# Altium PCB Arduino_Design_Project.PcbDoc
Units mm, origin at the board's own origin, x right, y up, seen from the top; angles counter-clockwise.
Board outline 85 x 56 mm, 2 copper layers (Top Layer, Bottom Layer); 52 components, 53 nets, 203 pads, 0 vias.
Unrouted connection lines stored in the file: 142.
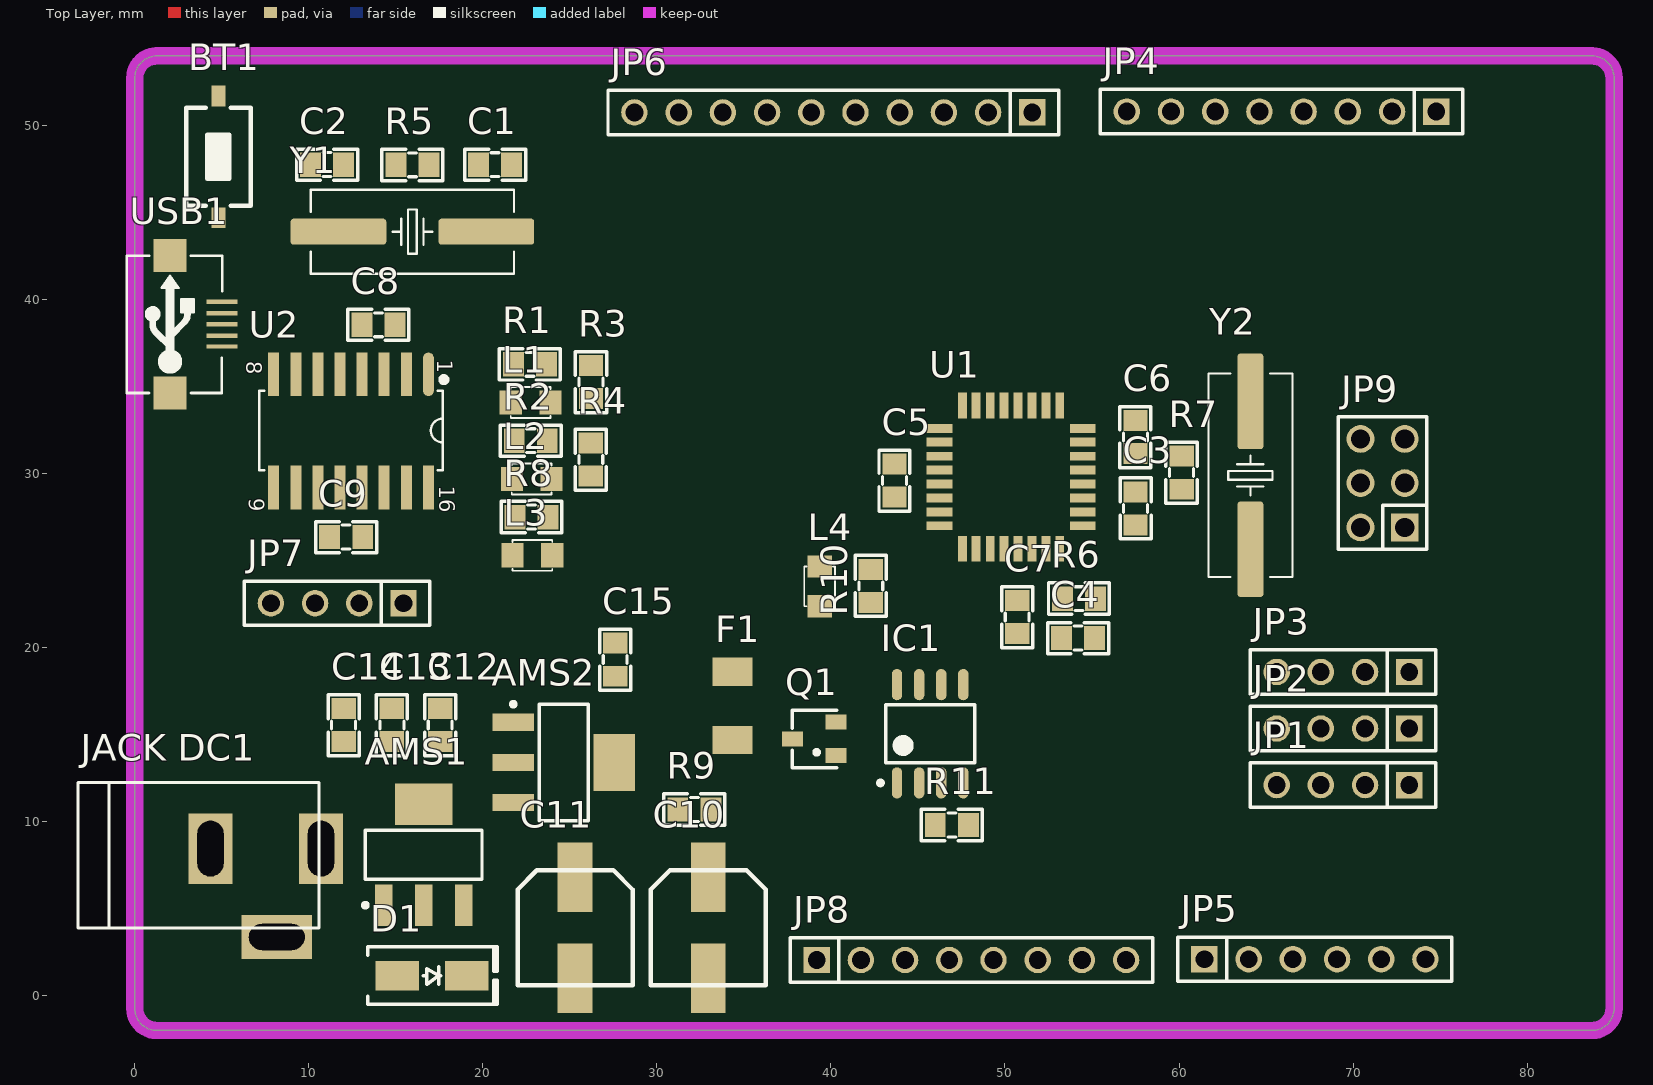
[diagram p0: Top Layer view]
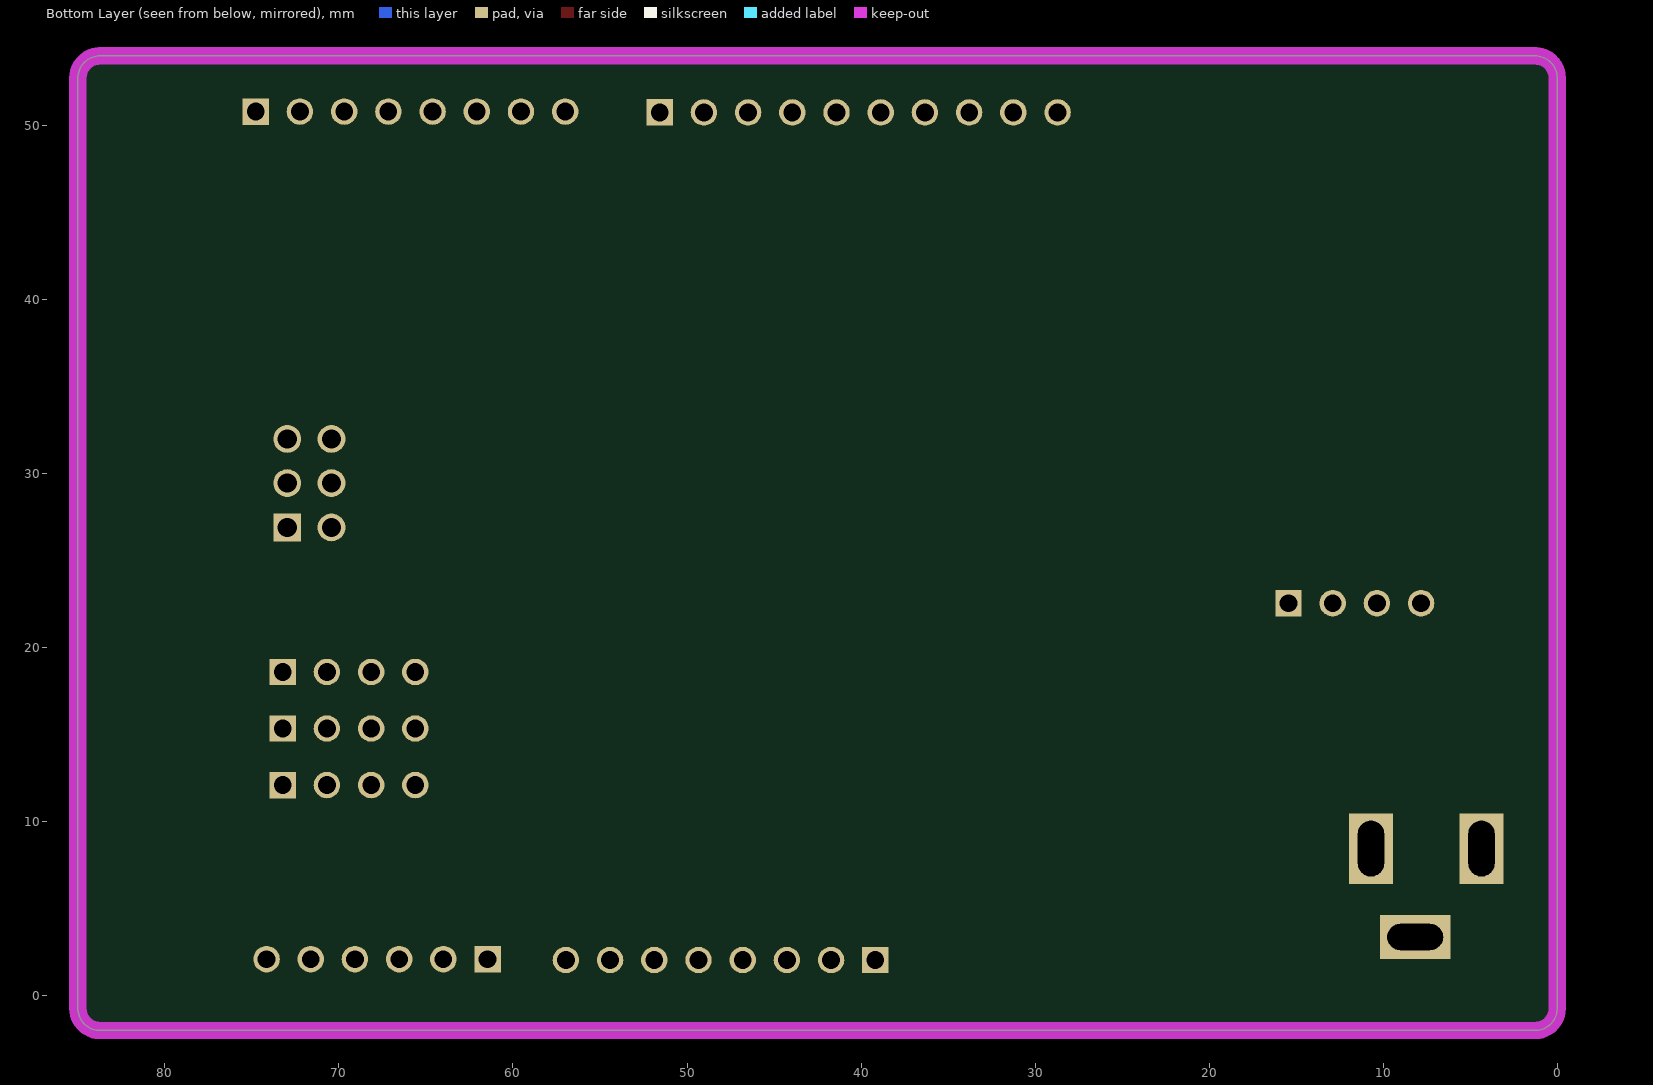
[diagram p1: Bottom Layer view, seen from below]

## Layer stack, top to bottom
Top Solder: solder mask 0.0102, Solder Resist, Dk 3.5
Top Layer: signal copper 0.0356
Dielectric 1: dielectric 0.32, FR-4, Dk 4.8
Bottom Layer: signal copper 0.0356
Bottom Solder: solder mask 0.0102, Solder Resist, Dk 3.5

## Board outline
0,-0.73 0,52.73 cw(c1.27,52.73) 1.27,54 83.73,54 cw(c83.73,52.73) 85,52.73 85,-0.73 cw(c83.73,-0.73) 83.73,-2 1.27,-2 cw(c1.27,-0.73)

## Design rules (kind name [scope] priority, off if disabled: settings)
Clearance [All] p1: gap=0.254 ignorepadtopadclearanceinfootprint=FALSE
DiffPairsRouting [All] p1: maxlimit=0.254 minlimit=0.254 mostfreqgap=0.254 toplayer_minwidth=0.381 toplayer_maxwidth=0.381 toplayer_prefwidth=0.381 bottomlayer_minwidth=0.381 bottomlayer_maxwidth=0.381 bottomlayer_prefwidth=0.381 maxuncoupledlength=12.7
PolygonConnect [All] p1: connectstyle=Relief reliefconductorwidth=0.254 reliefentries=4 polygonreliefangle="90 Angle" airgapwidth=0.254
RoutingVias [All] p1: holewidth=0.711 width=1.27 viastyle="Through Hole" minholewidth=0.711 minwidth=1.27 maxholewidth=0.711 maxwidth=1.27
SolderMaskExpansion [All] p1: expansion=0.102 istentingtop=FALSE
SupplyNets "Schematic Supply Nets_4" [InNet('GND')] p1: voltage=0.000
SupplyNets "Schematic Supply Nets_3" [InNet('VIN')] p2: voltage=0.000
SupplyNets "Schematic Supply Nets_2" [InNet('3.3V')] p3: voltage=0.000
SupplyNets "Schematic Supply Nets_1" [InNet('5V')] p4: voltage=0.000
SupplyNets "Schematic Supply Nets" [InNet('VUSB')] p5: voltage=0.000
Width [All] p1: maxlimit=1.016 minlimit=0.254 preferedwidth=0.508
29 further rules are at their usual default settings.

## Classes and differential pairs
differential pair USB: +USB_P -USB_N

## Components (designator, comment, footprint, x,y, rotation, side; value= is the part's Value field where it differs from the comment)
AMS1 "AMS1117-3.3V" SOT223 16.6,8.1 r0 top value="AMS1117-3.3V SOT223"
AMS2 "AMS1117-3.3V" SOT223 24.65,13.4 r270 top value="AMS1117-3.3V SOT223"
BT1 "Nut Nhan 2 Chan SMD 3x6x2.5" "Nut Nhan 2 Chan SMD 3x6x2.5" 4.8,48.2 r270 top
C1 "22pF" "tu 0805" 20.7,47.75 r0 top
C2 "22pF" "tu 0805" 11.054,47.75 r180 top
C3 "22pF" "tu 0805" 57.503,28.004 r270 top
C4 "104" "tu 0805" 54.2,20.55 r180 top
C5 "104" "tu 0805" 43.65,29.6 r90 top
C6 "22pF" "tu 0805" 57.497,32.096 r90 top
C7 "104" "tu 0805" 50.703,21.754 r270 top
C8 "104" "tu 0805" 13.996,38.553 r0 top
C9 "104" "tu 0805" 12.15,26.35 r180 top
C10 "47uF" "tu nhom 6.3 (d)" 32.95,3.9 r270 top
C11 "47uF" "tu nhom 6.3 (d)" 25.3,3.9 r270 top
C12 "104" "tu 0805" 17.55,15.55 r270 top
C13 "104" "tu 0805" 14.775,15.55 r270 top
C14 "104" "tu 0805" 12,15.55 r270 top
C15 "104" "tu 0805" 27.6,19.3 r90 top
D1 "M7" "DIODE SMA" 17.069,1.15 r0 top
F1 "0.5A 125V" "Cau Chi SMD1808" 34.35,16.65 r270 top
IC1 "LM358 SOP8" "SOP 8" 45.7,15.05 r90 top
"JACK DC1" "JACK DC 5.5" "JACK DC 5.5" 7.525,5.91 r0 top value="Jac DC"
JP1 "JP 1x4 2.54" "JP 1x4 CT" 73.23,12.104 r180 top
JP2 "JP 1x4 2.54" "JP 1x4 CT" 73.23,15.352 r180 top
JP3 "JP 1x4 2.54" "JP 1x4 CT" 73.23,18.6 r180 top
JP4 "JP 1x8 2.54" "JP 1x8 CT" 74.78,50.8 r180 top
JP5 "JP 1x6 2.54" "JP 1x6 CT" 61.46,2.1 r0 top
JP6 "JP 1x10 2.54" "JP 1x10 CT" 51.57,50.75 r180 top
JP7 "JP 1x4 2.54" "JP 1x4 CT" 15.44,22.55 r180 top
JP8 "JP 1x8 2.54" "JP 1x8 CT" 39.18,2.05 r0 top
JP9 "JP 2x3 2.54" "JP 2x3 DT" 71.7,29.45 r90 top
L1 "LED 0805" LED-0805-Yellow 21.6,34.083 r0 top
L2 "LED 0805" LED-0805-Yellow 21.664,29.692 r0 top
L3 "LED 0805" LED-0805-Red 21.7,25.3 r0 top
L4 "LED 0805" LED-0805-Red 39.35,24.663 r270 top
Q1 "HF" SOT-23 39.05,14.745 r90 top value=C9014
R1 "1k" "tro smd 0805" 22.704,36.215 r180 top
R2 "1k" "tro smd 0805" 22.746,31.951 r0 top
R3 "1k" "tro smd 0805" 26.15,35.25 r90 top
R4 "1k" "tro smd 0805" 26.261,30.804 r270 top
R5 "1M" "tro smd 0805" 15.95,47.801 r0 top
R6 "10k" "tro smd 0805" 54.25,22.75 r180 top
R7 "1M" "tro smd 0805" 60.211,30.054 r270 top
R8 "1k" "tro smd 0805" 22.796,27.559 r0 top
R9 "10k" "tro smd 0805" 32.154,10.639 r180 top
R10 "1k" "tro smd 0805" 42.35,23.55 r270 top
R11 "10k" "tro smd 0805" 46.95,9.75 r180 top
U1 "ATMEGA168-20AU" ATMEGA168 50.35,29.8 r180 top
U2 "CH340C" SOIC16_50_284_25X90_SMT 12.45,32.45 r270 top
USB1 "USB Micro 5p SMD" "USB Micro 5p SMD" 5,38.57 r90 top
Y1 "16Mhz" "Thach Anh 2 chan SMD" 15.95,43.9 r0 top value=4Mhz
Y2 "16Mhz" "Thach Anh 2 chan SMD" 64.1,29.9 r270 top value=4Mhz

## Footprints (in the part's own frame and the unit in brackets; to place one, negate y for a bottom-side part, rotate by r counter-clockwise, add the part's x,y. Pads: shape width x height; smd on the part's side, far side on the other; paste and mask are expansions set on the pad)
ATMEGA168 [mil]
  rect 58x20 smd: 1(-162,110) 2(-162,79) 3(-162,47) 4(-162,16) 5(-162,-16) 6(-162,-47) 7(-162,-79) 8(-162,-110) 17(162,-110) 18(162,-79) 19(162,-47) 20(162,-16) 21(162,16) 22(162,47) 23(162,79) 24(162,110)
  rect 20x58 smd: 9(-110,-162) 10(-79,-162) 11(-47,-162) 12(-16,-162) 13(16,-162) 14(47,-162) 15(79,-162) 16(110,-162) 25(110,162) 26(79,162) 27(47,162) 28(16,162) 29(-16,162) 30(-47,162) 31(-79,162) 32(-110,162)
  body extent -177,-177 177,177, height 47
"Cau Chi SMD1808" [mil]
  rect 64x90 smd: 1(-77,0) 2(77,0)
  body extent -91,-39 91,39, height 39
"DIODE SMA" [mm] "SMA"
  rect 2.5x1.7 smd: 1(-2,0) 2(2,0)
  silkscreen extent -3.68,-1.65 3.75,1.65, body extent -2.6,-1.37 2.6,1.37, height 2.4
"JACK DC 5.5" [mm] "Jac DC input"
  rect 2.54x4.064 hole 1.5 slot 3.2 at 90 deg: 1(3.175,2.54) 2(-3.175,2.54)
  rect 4.064x2.54 hole 1.5 slot 3.2 at 0 deg: 3(0.635,-2.54)
  silkscreen extent -10.79,-2.03 3.05,6.35, body extent -10.42,-2.67 3.4,6.84, height 11.02
"JP 1x4 CT" [mm]
  rect 1.52x1.52 hole 1.02: 1(0,0)
  round 1.52 hole 1.02: 2(2.54,0) 3(5.08,0) 4(7.62,0)
  silkscreen extent -1.52,-1.27 9.14,1.27, body extent -1.52,-1.25 9.14,1.25, height 8.51
"JP 1x6 CT" [mm] "6 row, straight, gold plating"
  rect 1.52x1.52 hole 1.02: 1(0,0)
  round 1.52 hole 1.02: 2(2.54,0) 3(5.08,0) 4(7.62,0) 5(10.16,0) 6(12.7,0)
  silkscreen extent -1.52,-1.27 14.22,1.27, body extent -1.52,-1.25 14.22,1.25, height 8.51
"JP 1x8 CT" [mm] "8 row, straight, gold plating"
  rect 1.52x1.52 hole 1.02: 1(0,0)
  round 1.52 hole 1.02: 2(2.54,0) 3(5.08,0) 4(7.62,0) 5(10.16,0) 6(12.7,0) 7(15.24,0) 8(17.78,0)
  silkscreen extent -1.52,-1.27 19.3,1.27, body extent -1.52,-1.25 19.3,1.25, height 8.51
"JP 1x10 CT" [mm] "10 row, straight, gold plating"
  rect 1.52x1.52 hole 1.02: 1(0,0)
  round 1.52 hole 1.02: 2(2.54,0) 3(5.08,0) 4(7.62,0) 5(10.16,0) 6(12.7,0) 7(15.24,0) 8(17.78,0) 9(20.32,0) 10(22.86,0)
  silkscreen extent -1.52,-1.27 24.38,1.27, body extent -1.52,-1.25 24.38,1.25, height 8.51
"JP 2x3 DT" [mm]
  rect 1.6x1.6 hole 1.1: 1(-2.54,-1.27)
  round 1.6 hole 1.1: 2(0,-1.27) 3(2.54,-1.27) 4(2.54,1.27) 5(0,1.27) 6(-2.54,1.27)
  silkscreen extent -3.81,-2.54 3.81,2.54, body extent -3.81,-2.54 3.81,2.54, height 8.55
LED-0805-Red [mil]
  rect 50x55 smd: 1(0,0) 2(90,0)
  silkscreen extent 0,-35 90,35, body extent 5,-25 85,25, height 43
LED-0805-Yellow [mil]
  rect 50x55 smd: 1(0,0) 2(90,0)
  silkscreen extent 0,-35 90,35, body extent 5,-25 85,25, height 43
"Nut Nhan 2 Chan SMD 3x6x2.5" [mm] "Switch SMD type"
  rect 1.2x0.8 smd: 1(-3.5,0) 2(3.5,0)
  silkscreen extent -2.82,-1.85 2.82,1.85, body extent -3.05,-1.85 3.05,1.85, height 2.5
SOIC16_50_284_25X90_SMT [mm]
  oval 2.5x0.635 smd mask+0.076: 1(-3.25,4.42)
  rect 2.5x0.635 smd mask+0.076: 2(-3.25,3.15) 3(-3.25,1.88) 4(-3.25,0.61) 5(-3.25,-0.66) 6(-3.25,-1.93) 7(-3.25,-3.2) 8(-3.25,-4.47) 9(3.25,-4.47) 10(3.25,-3.2) 11(3.25,-1.93) 12(3.25,-0.66) 13(3.25,0.61) 14(3.25,1.88) 15(3.25,3.15) 16(3.25,4.42)
  silkscreen extent -3.07,-5.3 2.26,5.44, body extent -3.02,-4.97 2.98,4.93, height 1.4
"SOP 8" [mm] "SOIC, 8-Leads, Body 4.9x3.9mm, Pitch 1.27mm, IPC High Density"
  oval 1.8x0.6 smd: 1(-2.825,1.905) 2(-2.825,0.635) 3(-2.825,-0.635) 4(-2.825,-1.905) 5(2.825,-1.905) 6(2.825,-0.635) 7(2.825,0.635) 8(2.825,1.905)
  silkscreen extent -2.95,-2.55 1.68,2.98, body extent -2.99,-2.45 3,2.45, height 1.6
SOT223 [mm]
  rect 1x2.4 smd: 1(-2.3,-2.9) 2(0,-2.9) 3(2.3,-2.9)
  rect 3.3x2.4 smd: 4(0,2.9)
  silkscreen extent -3.47,-3.02 3.35,1.4, body extent -3.25,-3.56 3.25,3.4, height 1.68
SOT-23 [mm] "SOT 23 _ 1-3-2"
  rect 0.85x1.2 smd: 1(-0.94,-1.245) 2(0.985,-1.25) 3(0.005,1.25)
  silkscreen extent -1.65,-1.27 1.65,1.27, body extent -1.47,-1.33 1.53,1.17, height 1.06
"Thach Anh 2 chan SMD" [mm] "SMD Crystal HC49/US-SM package"
  round 0.508 on Mech15: 0(0,0)
  rrect25% 5.5x1.5 smd: 1(-4.25,0) 2(4.25,0)
  silkscreen extent -5.84,-2.41 5.84,2.41, body extent -6.4,-2.41 6.4,2.42, height 4.29
"tro smd 0805" [mm]
  rect 1.2x1.4 smd: 1(-0.946,-0.061) 2(0.954,-0.061)
  silkscreen extent -1.75,-0.97 1.75,0.84, body extent -1.56,-0.76 1.44,0.64, height 0.53
"tu 0805" [mm] "Compoment SMD 80x50mil"
  rect 1.2x1.4 smd: 1(-0.946,-0.003) 2(0.954,-0.003)
  silkscreen extent -1.75,-0.89 1.75,0.89, body extent -1.01,-0.64 1.01,0.63, height 0.61
"tu nhom 6.3 (d)" [mm]
  rect 4x2 smd: 1(-2.9,0) 2(2.9,0)
  silkscreen extent -3.3,-3.3 3.3,3.3, body extent -3.8,-3.3 3.8,3.3, height 8
"USB Micro 5p SMD" [mil]
  rect 10x70 smd: 2(25.59,0) 3(0,0) 4(-25.59,0) 5(-50,0) 22232(51.18,0)
  rect 74.8x74.8 smd: 5(-155.51,116.84) 5(155.51,116.84)
  silkscreen extent -155,-1 155,215, body extent -157,5 158,218, height 107

## Part data
AMS1 AMS2: library part "AMS1117 SMD", "Dán", Chung_Loai=Dán, Don_Vi=Con, Ma_Hang=MH000596
C1 C2 C3 C6: library part "Tu 0805 22pF 50V 10%", "Dán", Chung_Loai=Dán, Don_Vi=Con, Ma_Hang=MH004560, So_Chan=2, Ten_Linh_Kien="Tụ 0805 22P 10% 50V"
C4 C5 C7 C8 C9 C12 C13 C14 C15: library part "Tu 0805 104 50V 10%", "Dán", Chung_Loai=Dán, Don_Vi=Con, Ma_Hang=MH004551, So_Chan=2, Ten_Linh_Kien="Tụ 0805 104-100nF 10% 50V"
C10 C11: library part "Tu Nhom 47uF 25V", "Dán", Chung_Loai=Dán, Don_Vi=Con, Ma_Hang=MH002216, So_Chan=2, Ten_Linh_Kien="Tụ Nhôm 47uF 25V 6.3x5.5MM"
D1: library part "Diode M7 ( 4007 )", "Dán", Chung_Loai=Dán, Don_Vi=Con, Ma_Hang=MH000944, Ten_Linh_Kien="Diode M7 1N4007 SMD 1A 1000V"
F1: library part "Cau chi 0.5A 125V SMD1808", "Cau chi 0.5A 125V SMD1808", Ma_Hang=MH009241, Ten="Cầu Chì 0.5A 125V SMD1808 0451.500MRL"
IC1: "Dán", Chung_Loai=Dán, Don_Vi=Con, Ma_Hang=MH000609, Ten_Linh_Kien="LM358 SOP8"
JP1 JP2 JP3 JP7: library part "JP 1x4 2.54 Cai Thang", "Cắm", Chung_Loai=Cắm, Don_Vi=Con, Ma_Hang=MH004006, Ten_Linh_Kien="Jump Đơn Cái 2.54MM 1x20P Thẳng"
JP4 JP8: library part "JP 1x8 2.54 Cai Thang", "Cắm", Chung_Loai=Cắm, Don_Vi=Con, Ma_Hang=MH004006, Ten_Linh_Kien="Jump Đơn Cái 2.54MM 1x20P Thẳng"
JP5: library part "JP 1x6 2.54 Cai Thang", "Cắm", Chung_Loai=Cắm, Don_Vi=Con, Ma_Hang=MH004006, Ten_Linh_Kien="Jump Đơn Cái 2.54MM 1x20P Thẳng"
JP6: library part "JP 1x10 2.54 Cai Thang", "Cắm", Chung_Loai=Cắm, Don_Vi=Con, Ma_Hang=MH004006, Ten_Linh_Kien="Jump Đơn Cái 2.54MM 1x20P Thẳng"
JP9: library part "JP 2x3 2.54 Duc Thang", "Cắm", Chung_Loai=Cắm, Don_Vi=Con, Ma_Hang=MH002686, Ten_Linh_Kien="Jump Đôi Đực 2.54MM 2x40P Thẳng 11MM"
L1 L2: library part "LED 0805 Vang", "Dán", Chung_Loai=Dán, Don_Vi=Con, Ma_Hang=MH002329, Ten_Linh_Kien="LED 0805 Màu Vàng ( Yellow)"
L3 L4: library part "LED 0805 Do", "Dán", Chung_Loai=Dán, Don_Vi=Con, Ma_Hang=MH000897, Ten_Linh_Kien="LED 0805 Màu Đỏ (Red)"
Q1: library part "Trans C1815 HF SMD", "SOT-23"
R1 R2 R3 R4 R8 R10: library part "Tro 0805 1% 1k", "Dán", Chung_Loai=Dán, Don_Vi=Con, Ma_Hang=MH005468, So_Chan=2, Ten_Linh_Kien="Trở 0805 1% 1k"
R5 R7: library part "Tro 0805 5% 1M", "Dán", Chung_Loai=Dán, Don_Vi=Con, Ma_Hang=MH005235, So_Chan=2, Ten_Linh_Kien="Trở 0805 5% 1M"
R6: library part "Tro 0805 5% 10k", "Dán", Chung_Loai=Dán, Don_Vi=Con, Ma_Hang=MH005239, So_Chan=2, Ten_Linh_Kien="Trở 0805 5% 10k"
R9 R11: library part "Tro 0805 1% 10k", "Dán", Chung_Loai=Dán, Don_Vi=Con, Ma_Hang=MH005473, So_Chan=2, Ten_Linh_Kien="Trở 0805 1% 10k"
U1: "AVR AVRÂ® ATmega Microcontroller IC 8-Bit 20MHz 16KB _8K x 16_ FLASH 32-TQFP _7x7_", Package="TQFP-32 Microchip", Availability=Unavailable, MF=Microchip, MP=ATMEGA168-20AU, Price=None, SnapEDA_Link=https://www.snapeda.com/parts/ATMEGA168-20AU/Microchip/view-part/776709/?ref=snap
U2: "USB Bridge, USB to UART USB 2.0 UART Interface", Alternate Part Number-1=NA, Case/Package=SOIC16, Manufacturer=Olimex, Supplier Part Number-1=C84681, Manufacturer Part Number=CH340C, Supplier-1=LCSC
USB1: "USB Type B", Ma_Hang=MH001020, Ten="MicroUSB MK5P SMD"
Y1 Y2: library part "Thach Anh 2 chan SMD", "Crystal For all Crystal 2pin."
BT1: Ma_Hang=MH001036, Ten="Nút Nhấn 2 Chân 3x6x2.5MM SMD"

## Nets (pads, with @x,y where several pads share a name; then routed paths per layer and width w, separated by ;. In a path a pad name is that pad's centre, name@x,y a point inside that pad or via, vN(x,y) a via of type N, cw(c..) or ccw(c..) an arc to the next point about the centre after c; other vN are vias at no path point)
3.3V: AMS2.2 AMS2.4 C15.1 IC1.2 JP2.1 JP2.2 JP8.4
5V: AMS1.2 AMS1.4 AMS2.3 C4.1 C8.2 C10.1 C12.1 C13.1 C14.1 IC1.8 JP1.3 JP3.3 JP8.2 JP8.5 JP9.6 Q1.2 R1.1 R2.2 R6.1 R8.2 U1.4 U1.6 U1.18 U2.16
ADC0: JP5.1 U1.23
ADC1: JP5.2 U1.24
ADC2: JP5.3 U1.25
ADC3: JP5.4 U1.26
ADC4/SDA: JP3.2 JP5.5 JP6.9 U1.27
ADC5/SCL: JP3.1 JP5.6 JP6.10 U1.28
AREF: C5.2 JP6.8 U1.20
CH340_XT1: C1.1 R5.2 U2.7 Y1.2
CH340_XT2: C2.1 R5.1 U2.8 Y1.1
CMD_PWR: IC1.1 Q1.1
CTS: JP7.4 U2.9
DCD: JP7.1 U2.12
DSR: JP7.3 U2.10
DTR: C9.1 U2.13
GND: "JACK DC1.2" "JACK DC1.3" AMS1.1 AMS2.1 BT1.1 C1.2 C2.2 C3.2 C4.2 C5.1 C6.2 C7.2 C10.2 C11.2 C12.2 C13.2 C14.2 C15.2 IC1.4 JP1.4 JP2.3 JP2.4 JP3.4 JP6.7 JP8.6 JP8.7 JP9.4 L3.2 L4.2 R11.1 U1.3 U1.5 U1.21 U2.1 USB1.5
IO0/RXD: JP1.1 JP4.1 U1.30
IO1/TXD: JP1.2 JP4.2 U1.31
IO2: JP4.3 U1.32
IO3: JP4.4 U1.1
IO4: JP4.5 U1.2
IO5: JP4.6 U1.9
IO6: JP4.7 U1.10
IO7: JP4.8 U1.11
IO8: JP6.1 U1.12
IO9: JP6.2 U1.13
MISO: JP6.5 JP9.1 U1.16
MOSI: JP6.4 JP9.5 U1.15
NetD1_1: "JACK DC1.1" D1.1
NetF1_1: F1.1 USB1.22232
NetIC1_3: IC1.3 R9.1 R11.2
NetIC1_5: IC1.5 JP9.2
NetIC1_6: IC1.6 IC1.7 R10.2
NetL1_1: L1.1 R1.2
NetL1_2: L1.2 R3.1
NetL2_1: L2.1 R2.1
NetL2_2: L2.2 R4.2
NetL3_1: L3.1 R8.1
NetL4_1: L4.1 R10.1
NetR3_2: R3.2 U2.2
NetR4_1: R4.1 U2.3
OSC1: C3.1 R7.2 U1.7 Y2.2
OSC2: C6.1 R7.1 U1.8 Y2.1
RESET: BT1.2 C7.1 C9.2 JP8.3 JP9.3 R6.2 U1.29
RI: JP7.2 U2.11
SCK: JP6.6 U1.17
SS: JP6.3 U1.14
USB_N: U2.6 USB1.2
USB_P: U2.5 USB1.3
V3: C8.1 U2.4
VIN: AMS1.3 C11.1 D1.2 JP8.8 R9.2
VUSB: F1.2 Q1.3
pads on no net: JP8.1 U1.19 U1.22 U2.14 U2.15 USB1.4 Y1.0 Y2.0

## Keep-outs
Keep-Out Layer:
  lines w1: 0,-0.73 ccw(c1.27,-0.73) 1.27,-2 83.73,-2 ccw(c83.73,-0.73) 85,-0.73 85,52.73 ccw(c83.73,52.73) 83.73,54 1.27,54 ccw(c1.27,52.73) 0,52.73 0,0 0,-0.73

## Text inside footprints (layer, text, board x,y; h text height)
U2: Top Overlay "16" at 17.505,29.3 h0.89 r270; Top Overlay "9" at 6.541,28.572 h0.89 r270; Top Overlay "8" at 6.418,36.466 h0.89 r270; Top Overlay "1" at 17.378,36.539 h0.89 r270